# EAGLE board AD5791 (EAGLE 6.6.0)
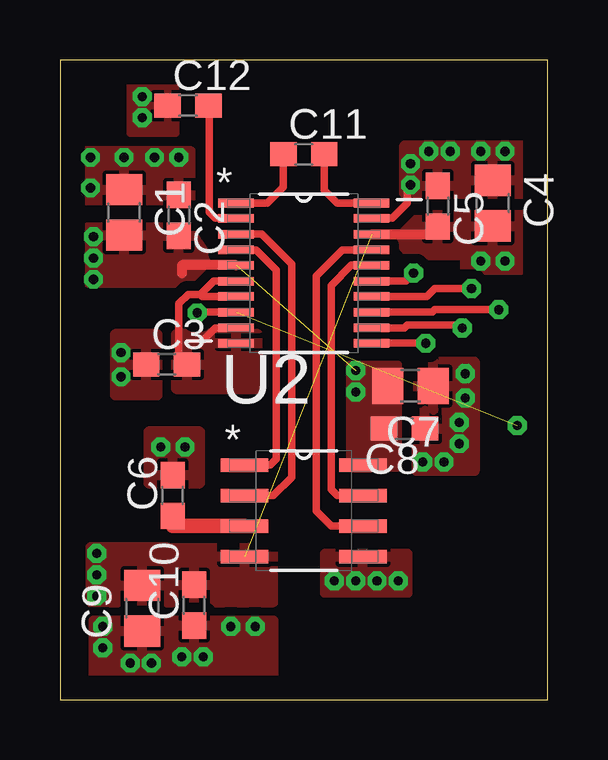
[diagram p0: board, top side]
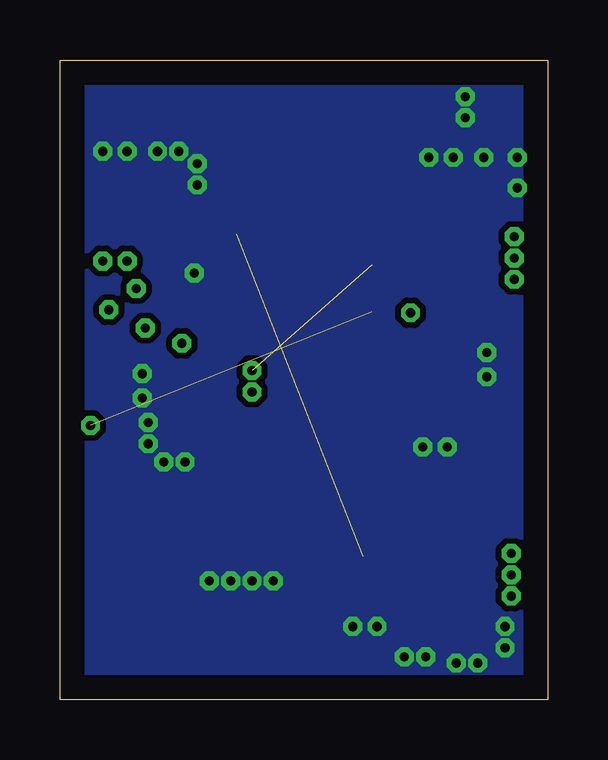
[diagram p1: board, bottom side, seen from below]

Size 20.32 x 26.67 mm. Coordinates in mm from the lower left corner, seen from the top.
Outline: 0,0 20.32,0 20.32,26.67 0,26.67 0,0
Copper layers (1*2*15*16): Top 0.035mm / dielectric 1.5mm / Route2 0.035mm / dielectric 0.15mm / Route15 0.035mm / dielectric 0.2mm / Bottom 0.035mm
Design rules "default *": minimum track width 6mil, minimum drill 15mil, track to track 6mil, track to pad 6mil, pad to pad 6mil, via to via 6mil, smd to smd 6mil, copper to edge 40mil, drill to drill 8mil, minimum pad ring 10mil, minimum via ring 8mil, stop-mask expansion 4mil, vias tented up to drill 0mil, thermal gap 6mil

## Footprints (pad centres in the part's own frame; a part is rotated, then mirrored left to right if it is on the bottom)
C0805 = smd 1.3 x 1.5: 1 -0.95,0; 2 0.95,0
C0603 = smd 1.1 x 1: 1 -0.85,0; 2 0.85,0
SOP65P640X120-20N = smd 1.473 x 0.356: 1 -2.819,2.921; 2 -2.819,2.286; 3 -2.819,1.626; 4 -2.819,0.965; 5 -2.819,0.33; 6 -2.819,-0.33; 7 -2.819,-0.965; 8 -2.819,-1.626; 9 -2.819,-2.286; 10 -2.819,-2.921; 11 2.819,-2.921; 12 2.819,-2.286; 13 2.819,-1.626; 14 2.819,-0.965; 15 2.819,-0.33; 16 2.819,0.33; 17 2.819,0.965; 18 2.819,1.626; 19 2.819,2.286; 20 2.819,2.921
SOIC127P600X175-8N = smd 1.981 x 0.559: 1 -2.464,1.905; 2 -2.464,0.635; 3 -2.464,-0.635; 4 -2.464,-1.905; 5 2.464,-1.905; 6 2.464,-0.635; 7 2.464,0.635; 8 2.464,1.905

## Placement (x,y rotation side)
C1  10uF  [C0805]  2.67,20.32 270 top
C2  0.1uF  [C0603]  4.95,20.19 270 top
C3  [C0603]  4.45,13.97 0 top
C4  10uF  [C0805]  18.03,20.7 270 top
C5  0.1uF  [C0603]  15.75,20.57 270 top
C6  0.1uF  [C0603]  4.7,8.51 90 top
C7  10uF  [C0805]  14.61,13.08 180 top
C8  0.1uF  [C0603]  14.35,11.3 180 top
C9  10uF  [C0805]  3.43,3.81 90 top
C10  0.1uF  [C0603]  5.59,3.94 90 top
C11  10pF  [C0603]  10.16,22.73 0 top
C12  50pF  [C0603]  5.33,24.77 0 top
U1  AD5791BRUZ  [SOP65P640X120-20N]  10.16,17.78 0 top
U2  AD8676ARZ  [SOIC127P600X175-8N]  10.16,7.87 0 top

## Library data of the parts
C1-C12 = eagle-ltspice; SPICEMODEL: NONE; SPICEPREFIX: C
U1 = Analog Devices_By_element14_Batch_1; MPN: AD5791BRUZ; OC_FARNELL: -; OC_NEWARK: 85R6432; PACKAGE: TSSOP-20; SUPPLIER: Analog Devices
U2 = Analog Devices_By_element14_Batch_1; MPN: AD8676ARZ; OC_FARNELL: 1316453; OC_NEWARK: 28M4146; PACKAGE: SOIC-8; SUPPLIER: Analog Devices

## Nets
+VPWR: C1.2 C2.2 C7.2 C8.2 U1.5 U2.8
-VPWR: C4.2 C5.2 C9.2 C10.2 U1.18 U2.4
ANALOG_REF: C6.1 U2.3
DPWR: C3.2 U1.6 U1.7 U1.9 U1.10
GND: C1.1 C2.1 C3.1 C4.1 C5.1 C6.2 C7.1 C8.1 C9.1 C10.1 C12.1 U1.15 U1.19 U2.5
LDAC: U1.8
N$1: U1.4 U2.1
N$2: U1.16 U2.7
N$3: U1.3 U2.2
N$4: U1.17 U2.6
N$5: C12.2 U1.2
N$6: C11.1 U1.1
N$7: C11.2 U1.20
SCLK_1: U1.13
SDIN_1: U1.12
SDO_1: U1.11
SYNC_1: U1.14

## Tracks (layer width: path | path; a pad name or v marks a point on that pad's centre or on a via)
+VPWR  (via drill 0.38)  (1 unrouted)
  Top 0.406: U1.5 5.08,18.11 5.08,17.78
  other vias: 12.32,13.72 12.32,12.83 1.4,19.3 1.4,18.41 1.4,17.53
  pour Top (isolate 0.406): 6.35,18.16 5.33,19.68 1.14,19.68 1.14,17.4 5.59,17.4
  pour Top (isolate 0.406, no thermals): 12.06,9.65 14.1,9.65 14.1,13.97 12.06,13.97
-VPWR  (via drill 0.38)  (1 unrouted)
  Top 0.406: U1.18 15.75,19.41 C5.2
  other vias: 17.53,18.29 18.54,18.29 1.52,6.1 1.52,5.21 1.52,4.32
  pour Top (isolate 0.406): 13.84,19.43 14.61,18.54 19.43,18.54 19.43,20.19 14.61,20.19
  pour Top (isolate 0.406): 7.62,6.35 1.27,6.35 1.27,4.06 8.89,4.06 8.89,6.48
  pour Top (isolate 0.406): 16.89,20.07 19.18,20.07 19.18,17.91 16.89,17.91
ANALOG_REF
  Top 0.61: U2.3 4.7,7.24 C6.1
DPWR
  Top 0.305: U1.6 6.4,17.45 5.84,16.89 | 5.84,16.89 5.33,16.89 4.95,16.51 4.95,14.31 C3.2 | U1.7 5.92,16.82 5.84,16.89 | U1.9 6.48,15.49 5.97,14.99
  pour Top (isolate 0.406): 8.26,15.24 4.83,15.24 4.83,12.95 8.26,12.95
GND  (via drill 0.38)
  Top 0.305: U1.15 14.4,17.45 v14.73,17.78 | U1.19 13.84,20.07 14.48,20.7 14.48,21.34
  other vias: 4.95,22.61 17.53,22.86 2.67,22.61 1.27,21.34 1.27,22.61 3.94,22.61 4.19,10.54 16.89,13.59 16.89,12.57 15.11,9.91 16,9.91 16.64,11.56 16.64,10.67 11.43,4.95 12.32,4.95 7.11,3.05 8.13,3.05 5.08,1.78 5.97,1.78 2.92,1.52 3.81,1.52 1.78,3.05 1.78,2.16 14.61,21.46 14.61,22.35 15.37,22.86 16.26,22.86 18.54,22.86 13.21,4.95 14.1,4.95 5.21,10.54 2.54,14.48 2.54,13.46 3.43,25.15 3.43,24.26
  pour Bottom (isolate 0.254): -1.27,27.94 21.59,27.94 21.59,-1.27 -1.27,-1.27
  pour Top (isolate 0.406): 5.46,22.86 1.02,22.86 1.02,20.83 5.46,20.83
  pour Top (isolate 0.406): 1.4,3.3 8.89,3.3 8.89,0.64 1.4,0.64
  pour Top (isolate 0.406): 14.73,23.11 19.3,23.11 19.3,21.08 14.35,21.08 14.35,23.11
  pour Top (isolate 0.406): 14.86,14.1 17.27,14.1 17.27,9.53 14.86,9.53
  pour Top (isolate 0.406): 11.05,6.1 14.48,6.1 14.48,4.45 11.05,4.45
  pour Top (isolate 0.406): 3.68,11.18 3.68,9.02 5.46,9.02 5.59,9.02 5.84,9.02 5.84,11.18
  pour Top (isolate 0.406): 2.29,15.24 2.29,12.7 4.06,12.7 4.06,15.24
  pour Top (isolate 0.406): 2.92,25.78 2.92,23.62 4.83,23.62 4.83,25.78
LDAC  (via drill 0.38)  (1 unrouted)
  Top 0.305: U1.8 5.97,16.15
  Top 0.406: 5.97,16.15 v5.71,16.13
  other vias: 19.05,11.43
N$1
  Top 0.305: U2.1 8.76,9.78 9.02,10.03 9.02,17.91 8.18,18.75 U1.4
N$2
  Top 0.305: U2.7 11.56,8.51 11.3,8.76 11.3,17.27 12.14,18.11 U1.16
N$3
  Top 0.305: U2.2 8.89,8.51 9.65,9.27 9.65,18.16 8.41,19.41 U1.3
N$4
  Top 0.305: U2.6 11.3,7.24 10.67,7.87 10.67,17.65 11.76,18.75 U1.17
N$5
  Top 0.305: U1.2 6.48,20.07 6.22,20.32 6.22,24.77 C12.2
N$6
  Top 0.305: U1.1 8.64,20.7 9.31,21.38 C11.1
N$7
  Top 0.305: U1.20 11.56,20.7 11.01,21.25 C11.2
SCLK_1  (via drill 0.38)
  Top 0.305: U1.13 15.52,16.15 15.62,16.26 v18.29,16.26
SDIN_1  (via drill 0.38)
  Top 0.254: v16.76,15.49 16.89,15.37
  Top 0.305: U1.12 14.35,15.49 14.48,15.62 16.64,15.62 v16.76,15.49
SDO_1  (via drill 0.38)
  Top 0.254: v15.24,14.86 15.37,14.73
  Top 0.305: U1.11 v15.24,14.86
SYNC_1  (via drill 0.38)
  Top 0.305: U1.14 15.29,16.82 15.62,17.14 v17.14,17.14